# Altium PCB SMT_Oven_V2.PcbDoc
Units mil, origin at the board's own origin, x right, y up, seen from the top; angles counter-clockwise.
Board outline 1968.5 x 2050 mil, 2 copper layers (Top Layer, Bottom Layer); 47 components, 58 nets, 221 pads, 4 vias.
Unrouted connection lines stored in the file: 125.
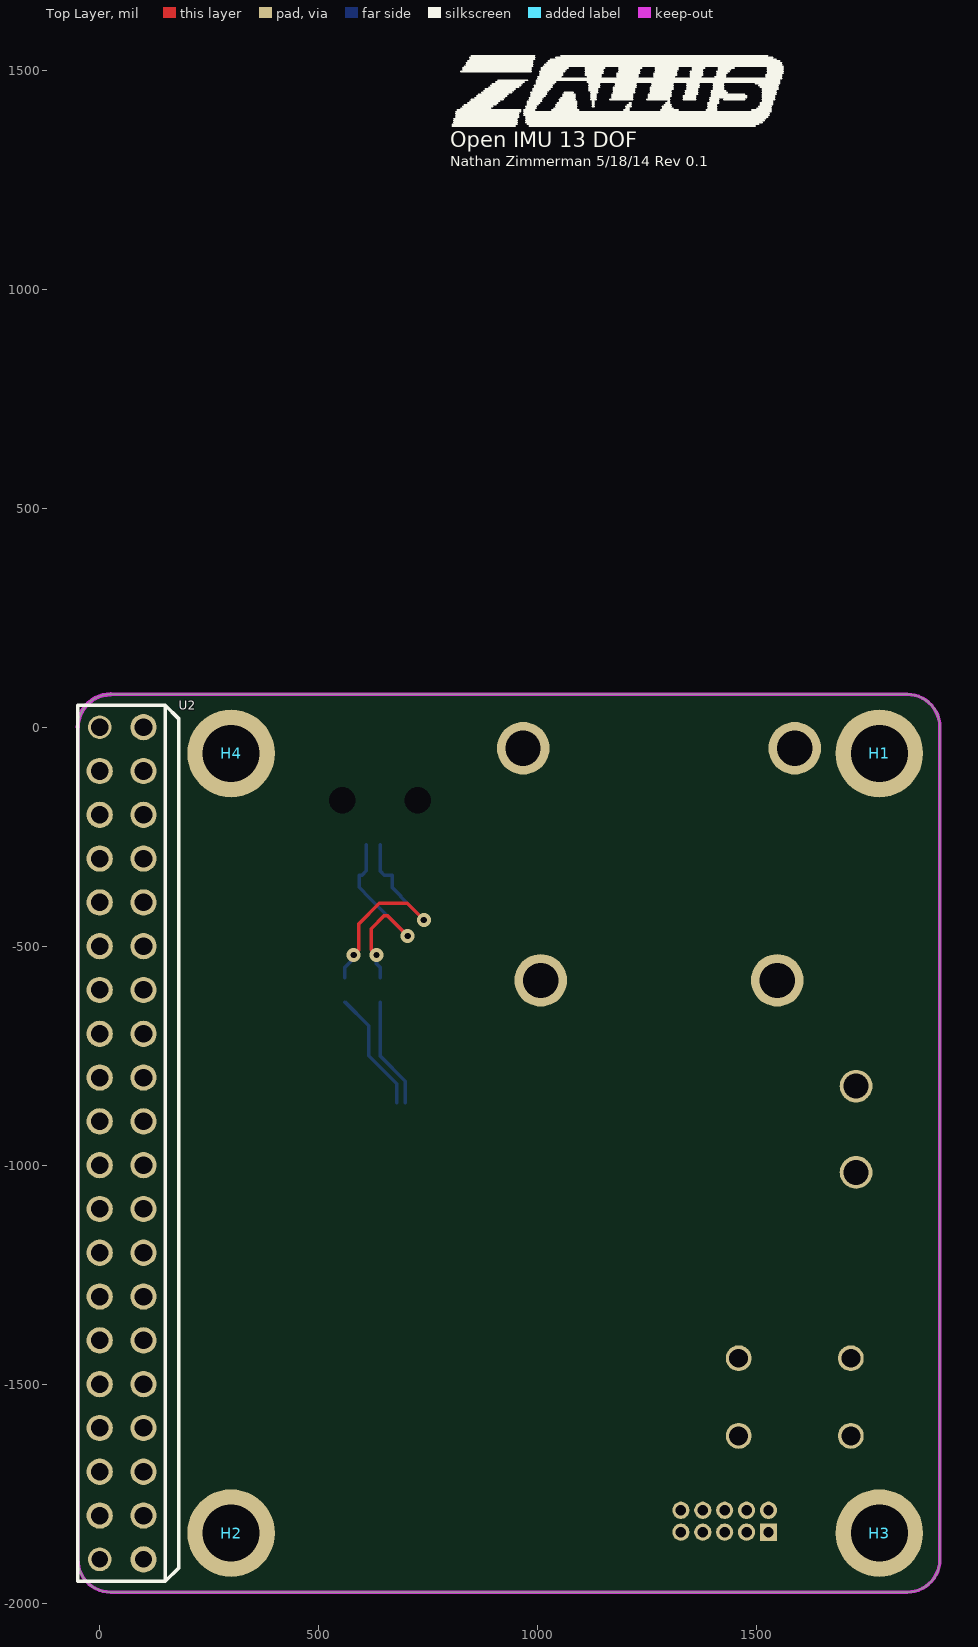
[diagram p0: Top Layer view]
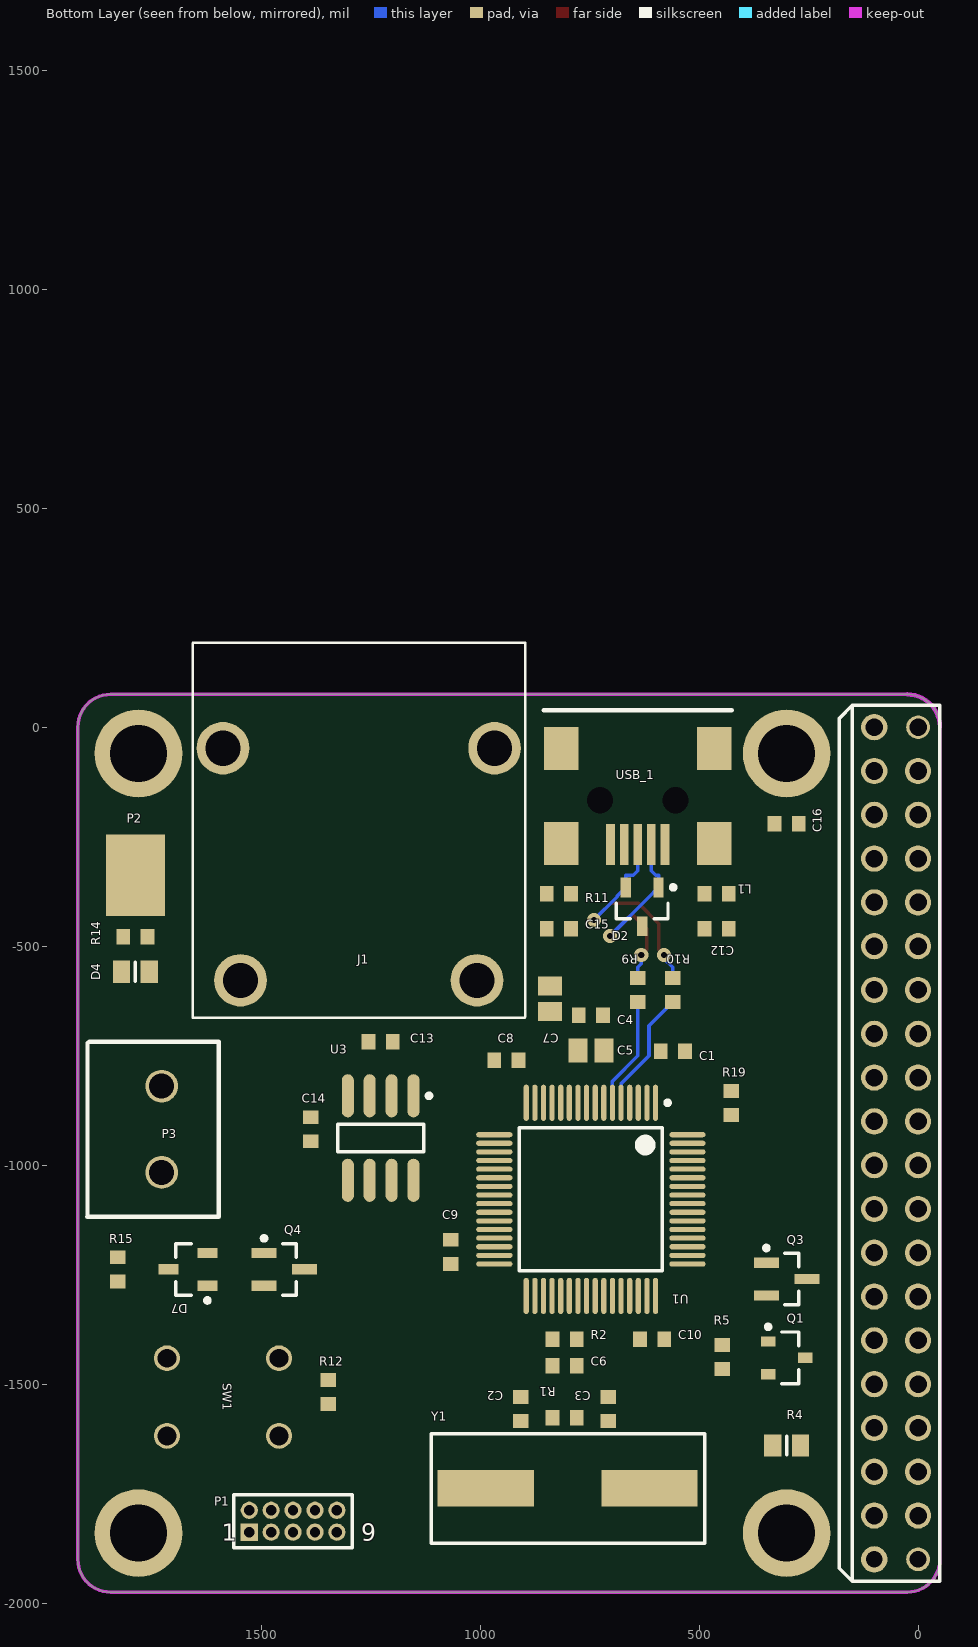
[diagram p1: Bottom Layer view, seen from below]

## Layer stack, top to bottom
Top Layer: signal copper 1.4
Dielectric: dielectric 12.6, FR-4, Dk 4.8
Bottom Layer: signal copper 1.4

## Board outline
-50,-1900 -50,0 cw(c25,0) 25,75 1843.5,75 cw(c1843.5,0) 1918.5,0 1918.5,-1900 cw(c1843.5,-1900) 1843.5,-1975 25,-1975 cw(c25,-1900)

## Design rules (kind name [scope] priority, off if disabled: settings)
AssemblyTestPointUsage [All] p1 off:
AssemblyTestpoint [All] p1 off: testpointundercomponent=TRUE minsize=40 maxsize=100 preferedsize=60 minholesize=0 maxholesize=40 preferedholesize=32 testpointgrid=1 usegrid=TRUE gridtolerance=0.01 allowsidetop=TRUE allowsidebottom=TRUE
Clearance Clearance_1 [IsVia vs IsVia] p1: gap=10
Clearance [All] p2: gap=7
DiffPairsRouting [All] p1: maxlimit=200 minlimit=10 mostfreqgap=10 maxuncoupledlength=1000
FabricationTestPointUsage [All] p1 off: valid=0 allowmultiple=FALSE
FabricationTestpoint [All] p1 off: side=3 testpointundercomponent=TRUE minsize=40 maxsize=100 preferedsize=60 minholesize=0 maxholesize=40 preferedholesize=32 testpointgrid=1 allowsidetop=TRUE allowsidebottom=TRUE usegrid=TRUE gridtolerance=0.01
HoleSize [All] p1: absolutevalues=TRUE maxlimit=250 minlimit=1 maxpercent=80.000 minpercent=20.000
HoleToHoleClearance [All] p1: gap=12 allowstackedmicrovias=FALSE
MinimumSolderMaskSliver [All] p1: minsoldermaskwidth=6
PlaneConnect [All] p1: planeconnectstyle=Relief reliefexpansion=20 reliefentries=4 reliefconductorwidth=20 reliefairgap=10
PolygonConnect PolygonConnect_1 [(InPadClass('All Pads'))] p1: connectstyle=Relief reliefconductorwidth=10 reliefentries=4 polygonreliefangle="90 Angle"
PolygonConnect [All] p2: connectstyle=Direct reliefconductorwidth=10 reliefentries=4 polygonreliefangle="90 Angle"
RoutingVias [All] p1: holewidth=14 width=32 viastyle="Through Hole" minholewidth=14 minwidth=32 maxholewidth=14 maxwidth=32
SilkToSilkClearance [All] p1: silktosilkclearance=4
SilkscreenOverComponentPads [All] p1: minsilkscreentomaskgap=4
SolderMaskExpansion SolderMaskExpansion_4 [InComponent('U4')] p1: expansion=2
SolderMaskExpansion SolderMaskExpansion_5 [InComponent('USB_1')] p2: expansion=2
SolderMaskExpansion SolderMaskExpansion_6 [InComponent('U2')] p3: expansion=6
SolderMaskExpansion SolderMaskExpansion_3 [InComponent('U8')] p4: expansion=2
SolderMaskExpansion SolderMaskExpansion_2 [InComponent('U6')] p5: expansion=6
SolderMaskExpansion SolderMaskExpansion_1 [InComponent('U9')] p6: expansion=6
SolderMaskExpansion [InComponent('U6')] p7: expansion=4
Width Width_3 [InNet('GND')] p1: maxlimit=40 minlimit=6 preferedwidth=12
Width Width_2 [InNet('3.3V')] p2: maxlimit=40 minlimit=6 preferedwidth=12
Width Width_1 [InNet('5V')] p3: maxlimit=40 minlimit=6 preferedwidth=12
Width [All] p4: maxlimit=80 minlimit=8 preferedwidth=8 minimp=50.000000 maximp=50.000000 favimp=50.000000
17 further rules are at their usual default settings.

## Classes and differential pairs
differential pair U: +U_P -U_N
differential pair USB_MCU: +USB_MCU_P -USB_MCU_N

## Components (designator, comment, footprint, x,y, rotation, side; value= is the part's Value field where it differs from the comment)
C1 "0805" 1608[0603] 560,-740 r180 bottom
C2 "0805" 1608[0603] 907,-1556.7 r270 bottom
C3 "0805" 1608[0603] 707,-1556.7 r270 bottom
C4 "0805" 1608[0603] 747,-658 r180 bottom
C5 "0805" C0805 747,-738 r180 bottom
C6 "0805" 1608[0603] 807,-1458 r0 bottom
C7 "0805" C0805 840,-620 r270 bottom
C8 "0805" 1608[0603] 940,-760 r180 bottom
C9 "0805" 1608[0603] 1067,-1198 r90 bottom
C10 "0805" 1608[0603] 607,-1398 r0 bottom
C12 "0805" 1608[0603] 460,-460 r0 bottom
C13 "0805" 1608[0603] 1227,-718 r0 bottom
C14 "0805" 1608[0603] 1387,-918 r270 bottom
C15 "0805" 1608[0603] 820,-460 r180 bottom
C16 "0805" 1608[0603] 300,-220 r180 bottom
D2 "Bat45C" SOT-23B_N 630,-410 r270 bottom
D4 "LED3" 6-0805_L 1787,-558 r0 bottom
D7 "Bat45C" SOT-23B_N 1667,-1238 r0 bottom
H1 "stand_off" 4-40_screw_hole 1780,-60 r0 top
H2 "stand_off" 4-40_screw_hole 300,-1840 r0 top
H3 "stand_off" 4-40_screw_hole 1780,-1840 r0 top
H4 "stand_off" 4-40_screw_hole 300,-60 r0 top
J1 "K_Female" PCC_SMP_K 1547,-578 r180 bottom
L1 "FB" 1608[0603] 460,-380 r0 bottom
P1 "Header 5X2" MHDR2X5 1527,-1838 r180 bottom
P2 "GND_CLIP" GND_CLIP 1787,-338 r270 bottom
P3 "Relay" 5mm_2TERM 1727,-918 r90 bottom
Q1 "k" SOT-23_L 300,-1440 r180 bottom
Q3 "2N7002P" SOT-23_M 300,-1260 r180 bottom
Q4 "2N7002P" SOT-23_M 1447,-1238 r180 bottom
R1 "Res1" 1608[0603] 807,-1576.7 r180 bottom
R2 "Res1" 1608[0603] 807,-1398 r180 bottom
R4 "Res1" 6-0805_L 300,-1640 r0 bottom
R5 "Res1" 1608[0603] 447,-1438 r90 bottom
R9 "Res1" 1608[0603] 640,-600 r270 bottom
R10 "Res1" 1608[0603] 560,-600 r270 bottom
R11 "Res1" 1608[0603] 820,-380 r0 bottom
R12 "Res1" 1608[0603] 1347,-1518 r90 bottom
R14 "Res1" 1608[0603] 1787,-478 r180 bottom
R15 "Res1" 1608[0603] 1827,-1238 r90 bottom
R19 "Res1" 1608[0603] 427,-858 r90 bottom
SW1 "D6x-XX" Tact_ButtonVV 1587,-1618 r180 bottom
U1 "MKL25Z64VLH4" TSQFP50P1200X1200-64M 747,-1078 r270 bottom
U2 "SSD1298" SSD1289_FT 0,0 r0 top
U3 "MAX6675" SO8_M 1227,-938 r270 bottom
USB_1 "USB-M2xFxx" USB-M2xFxx 640,-315 r0 bottom
Y1 "8MHz" crystal 987,-1738 r180 bottom

## Footprints (in the part's own frame and the unit in brackets; to place one, negate y for a bottom-side part, rotate by r counter-clockwise, add the part's x,y. Pads: shape width x height; smd on the part's side, far side on the other; paste and mask are expansions set on the pad)
4-40_screw_hole [mil] "4-40_screw_hole"
  round 200 hole 130: 1(0,0)
5mm_2TERM [mm]
  round 1.9 hole 1.45: 1(-2.5,0) 2(2.5,0)
  silkscreen extent -5.08,-3.3 5.08,4.32
6-0805_L [mm] "Chip Resistor, Body 2.0x1.2mm, IPC High Density"
  rect 1x1.3 smd: 1(-0.8,0) 2(0.8,0)
  silkscreen extent 0,-0.55 0,0.55, body extent -1.07,-0.7 1.07,0.7, height 0.7
1608[0603] [mm] "Chip Capacitor, Body 1.6x0.8mm, IPC High Density"
  rect 0.8x0.9 smd: 1(-0.7,0) 2(0.7,0)
  body extent -0.87,-0.48 0.87,0.48, height 1.3
C0805 [mm] "Chip Capacitor, Body 2.0x1.3mm, IPC High Density"
  rect 1.1x1.4 smd: 1(-0.75,0) 2(0.75,0)
  body extent -1.1,-0.72 1.1,0.72, height 1.4
crystal [mil]
  rect 220x83 smd: 1(0,0) 2(374,0)
  silkscreen extent -125,-125 500,125, body extent -37,-95 413,95, height 20
GND_CLIP [mil] "Ground clip for a probe"
  rect 185x135 smd: 1(0,0)
MHDR2X5 [mm]
  rect 1x1 hole 0.6: 1(0,0)
  round 1 hole 0.6: 2(0,1.27) 3(1.27,0) 4(1.27,1.27) 5(2.54,0) 6(2.54,1.27) 7(3.81,0) 8(3.81,1.27) 9(5.08,0) 10(5.08,1.27)
  silkscreen extent -0.9,-0.9 5.98,2.17
PCC_SMP_K [mil]
  round 120 hole 80: 1(0,0) 2(540,0) ""(-40,530) ""(580,530)
  silkscreen extent -109,-85 650,771
SO8_M [mm] "SOIC, 8-Leads, Body 4.9x3.9mm, Pitch 1.27mm, IPC Low Density"
  oval 2.5x0.7 smd: 1(-2.45,1.905) 2(-2.45,0.635) 3(-2.45,-0.635) 4(-2.45,-1.905) 5(2.45,-1.905) 6(2.45,-0.635) 7(2.45,0.635) 8(2.45,1.905)
  silkscreen extent -2.57,-2.5 0.8,2.93, body extent -2,-2.5 2,2.5, height 1.75
SOT-23_L [mm] "SOT23, 3-Leads, Body 2.9x1.3mm, Pitch 0.95mm, Lead Span 2.5mm, IPC High Density"
  rect 0.85x0.6 smd: 1(-1.075,0.95) 2(-1.075,-0.95) 3(1.075,0)
  silkscreen extent -1.2,-1.5 0.7,1.92, body extent -0.7,-1.5 0.7,1.5, height 1.1
SOT-23_M [mm] "SOT23, 3-Leads, Body 2.9x1.3mm, Pitch 0.95mm, Lead Span 2.5mm, IPC Low Density"
  rect 1.45x0.6 smd: 1(-1.175,0.95) 2(-1.175,-0.95) 3(1.175,0)
  silkscreen extent -1.3,-1.5 0.7,1.92, body extent -0.7,-1.5 0.7,1.5, height 1.1
SOT-23B_N [mm] "SOT23, 3-Leads, Body 2.9x1.3mm, Pitch 0.95mm, Lead Span 2.4mm, IPC Medium Density"
  rect 1.15x0.6 smd: 1(-1.125,0.95) 2(-1.125,-0.95) 3(1.125,0)
  silkscreen extent -1.25,-1.5 0.7,1.92, body extent -0.7,-1.5 0.7,1.5, height 1.14
SSD1289_FT [mil]
  round 54 hole 40: 1(0,0)
  round 60 hole 40: 2(0,-100) 3(0,-200) 4(0,-300) 5(0,-400) 6(0,-500) 7(0,-600) 8(0,-700) 9(0,-800) 10(0,-900) 11(0,-1000) 12(0,-1100) 13(0,-1200) 14(0,-1300) 15(0,-1400) 16(0,-1500) 17(0,-1600) 18(0,-1700) 19(0,-1800) 21(100,0) 22(100,-100) 23(100,-200) 24(100,-300) 25(100,-400) 26(100,-500) 27(100,-600) 28(100,-700) 29(100,-800) 30(100,-900) 31(100,-1000) 32(100,-1100) 33(100,-1200) 34(100,-1300) 35(100,-1400) 36(100,-1500) 37(100,-1600) 38(100,-1700) 39(100,-1800)
  round 54 hole 38: 20(0,-1900)
  round 60 hole 38: 40(100,-1900)
  silkscreen extent -50,-1950 180,50
Tact_ButtonVV [mm]
  round 1.5 hole 1.1: 1(-3.25,0) 2(3.25,0) 3(-3.25,4.5) 4(3.25,4.5)
TSQFP50P1200X1200-64M [mm] "Thin QFP, 64-Leads, Body 10x10mm, Pitch 0.5mm, IPC Low Density"
  oval 2.1x0.3 smd: 1(-5.6,3.75) 2(-5.6,3.25) 3(-5.6,2.75) 4(-5.6,2.25) 5(-5.6,1.75) 6(-5.6,1.25) 7(-5.6,0.75) 8(-5.6,0.25) 9(-5.6,-0.25) 10(-5.6,-0.75) 11(-5.6,-1.25) 12(-5.6,-1.75) 13(-5.6,-2.25) 14(-5.6,-2.75) 15(-5.6,-3.25) 16(-5.6,-3.75) 33(5.6,-3.75) 34(5.6,-3.25) 35(5.6,-2.75) 36(5.6,-2.25) 37(5.6,-1.75) 38(5.6,-1.25) 39(5.6,-0.75) 40(5.6,-0.25) 41(5.6,0.25) 42(5.6,0.75) 43(5.6,1.25) 44(5.6,1.75) 45(5.6,2.25) 46(5.6,2.75) 47(5.6,3.25) 48(5.6,3.75)
  oval 0.3x2.1 smd: 17(-3.75,-5.6) 18(-3.25,-5.6) 19(-2.75,-5.6) 20(-2.25,-5.6) 21(-1.75,-5.6) 22(-1.25,-5.6) 23(-0.75,-5.6) 24(-0.25,-5.6) 25(0.25,-5.6) 26(0.75,-5.6) 27(1.25,-5.6) 28(1.75,-5.6) 29(2.25,-5.6) 30(2.75,-5.6) 31(3.25,-5.6) 32(3.75,-5.6) 49(3.75,5.6) 50(3.25,5.6) 51(2.75,5.6) 52(2.25,5.6) 53(1.75,5.6) 54(1.25,5.6) 55(0.75,5.6) 56(0.25,5.6) 57(-0.25,5.6) 58(-0.75,5.6) 59(-1.25,5.6) 60(-1.75,5.6) 61(-2.25,5.6) 62(-2.75,5.6) 63(-3.25,5.6) 64(-3.75,5.6)
  silkscreen extent -5.72,-4.15 4.15,4.57, body extent -5,-5 5,5, height 1.6
USB-M2xFxx [mil] "USB Mini B connector SMD"
  rect 20x94 smd: 1(-62,-47) 2(-31,-47) 3(0,-47) 4(31,-47) 5(62,-47)
  rect 79x98 smd: 6(-175,-49) 7(-175,-266) 8(175,-266) 9(175,-49)
  round 0 hole 60 unplated: ""(-86,-148) ""(86,-148)
  silkscreen extent -215,-354 215,-354

## Part data
C1 C2 C3 C4 C5 C6 C7 C8 C9 C10 C12 C13 C14 C15 C16: library part "Cap Semi", "Capacitor (Semiconductor SIM Model)"
D4: "Typical BLUE SiC LED"
J1: library part K_Female_Thermocouple, "K_Female_Thermocouple"
L1: library part Inductor, "Inductor"
P1: "Header, 5-Pin, Dual row"
P3: library part MHDR1X2, "Header, 2-Pin"
Q1: library part PMOS-2, "P-Channel Power MOSFET"
R1 R2 R4 R5 R9 R10 R11 R12 R14 R15 R19: "Resistor"
SW1: "D6x-XX push button"
U1: "MKL25Z64VLH4 MCU"
U2: library part SSD1298_LCD, "SSD1298 LCD"
U3: library part Component_1
USB_1: "USB Mini-B for USB-M2xFxx"
Y1: library part XTAL, "Crystal Oscillator"

## Via types
v1: diameter 32, hole 14, Top Layer to Bottom Layer, 4 vias

## Nets (pads, with @x,y where several pads share a name; then routed paths per layer and width w, separated by ;. In a path a pad name is that pad's centre, name@x,y a point inside that pad or via, vN(x,y) a via of type N, cw(c..) or ccw(c..) an arc to the next point about the centre after c; other vN are vias at no path point)
3.3V: C1.2 C4.2 C5.2 C8.2 C9.2 C10.1 C14.1 C16.2 P1.1 R2.2 R12.1 R19.2 U1.3 U1.7 U1.13 U1.14 U1.30 U1.48 U2.2 U3.4
5V: C7.2 C12.1 D7.1 L1.1 Q1.2 R5.1 R15.2 U1.8
_NC1: U3.8
EXTAL+: C2.2 R1.1 U1.32 Y1.1
EXTAL-: C3.2 R1.2 U1.33 Y1.2
GND: C1.1 C2.1 C3.1 C4.1 C5.1 C6.1 C7.1 C8.1 C9.1 C10.2 C12.2 C14.2 C15.2 C16.1 D2.3 D4.2 P1.3 P1.5 P2.1 Q3.3 Q4.3 R11.1 SW1.1 SW1.2 U1.4 U1.15 U1.16 U1.31 U1.47 U2.1 U3.1 USB_1.5
KL25_SWD_CLK: P1.4 U1.22
LCD_BL: Q3.1 U1.42
LCD_CS: U1.28 U2.15
LCD_DB0: U1.43 U2.21
LCD_DB1: U1.44 U2.22
LCD_DB2: U1.45 U2.23
LCD_DB3: U1.46 U2.24
LCD_DB4: U1.49 U2.25
LCD_DB5: U1.50 U2.26
LCD_DB6: U1.51 U2.27
LCD_DB7: U1.52 U2.28
LCD_DB8: U1.53 U2.7
LCD_DB9: U1.54 U2.8
LCD_DB10: U1.55 U2.9
LCD_DB11: U1.56 U2.10
LCD_DB12: U1.35 U2.11
LCD_DB13: U1.36 U2.12
LCD_DB14: U1.37 U2.13
LCD_DB15: U1.38 U2.14
LCD_RD: U1.27 U2.6
LCD_RS: U1.24 U2.4
LCD_RST: U1.23 U2.17
LCD_WR: U1.29 U2.5
LED: R14.1 U1.19
NC1_ST: H1.1
NC2_ST: H2.1
NC3_ST: H3.1
NC4_ST: H4.1
NetC13_1: C13.1 J1.2 U3.2
NetC13_2: C13.2 J1.1 U3.3
NetC15_1: C15.1 R11.2 USB_1.6 USB_1.7 USB_1.8 USB_1.9
NetD4_1: D4.1 R14.2
NetD7_3: D7.3 P3.2 Q4.2
NetL1_2: L1.2 USB_1.1
NetP3_1: P3.1 R15.1
NetQ1_1: Q1.1 Q3.2 R5.2
NetQ1_3: Q1.3 R4.2
NetR4_1: R4.1 U2.19
PWR_RELAY: Q4.1 R19.1 U1.64
RST_TGTMCU: C6.2 P1.10 R2.1 U1.34
SD_CS: U1.18 U2.38
SPI_A_MISO: U1.60 U2.33 U2.35 U3.7
SPI_A_MOSI: U1.59 U2.31 U2.37
SPI_A_SCLK: U1.58 U2.29 U2.36 U3.5
SW1: R12.2 SW1.3 SW1.4 U1.17
SWD_DIO_TGTMCU: P1.2 U1.25
TCOUPLE_CS: U1.63 U3.6
TOUCH_CS: U1.62 U2.30
U_N: D2.1 R9.1 USB_1.2 | length 500.9
  Top Layer w8: v1(632,-520) 620,-508 620,-460 650,-430 656.46,-430 v1(703.23,-476.77)
  Bottom Layer w8: USB_1.2 609,-328 599,-338 592.6,-338 D2.1 617,-390.11 617,-390.54 v1(703.23,-476.77) ; v1(632,-520) 632,-540 640,-548 R9.1
U_P: D2.2 R10.1 USB_1.3 | length 543.9
  Top Layer w8: v1(580,-520) 592,-508 592,-448.4 638.4,-402 702,-402 v1(740,-440)
  Bottom Layer w8: R10.1 560,-548 580,-528 v1(580,-520) ; USB_1.3 640,-328 650,-338 667.4,-338 D2.2 687,-385.31 687,-387 v1(740,-440)
USB_MCU_N: R9.2 U1.6 | length 253.9
  Bottom Layer w8: R9.2 640,-750.21 697.79,-808 U1.6
USB_MCU_P: R10.2 U1.5 | length 278.9
  Bottom Layer w8: R10.2 614.31,-681.87 614.31,-749.97 678.1,-813.77 U1.5
pads on no net: D7.2 J1. P1.6 P1.7 P1.8 P1.9 U1.1 U1.2 U1.9 U1.10 U1.11 U1.12 U1.20 U1.21 U1.26 U1.39 U1.40 U1.41 U1.57 U1.61 U2.3 U2.16 U2.18 U2.20 U2.32 U2.34 U2.39 U2.40 USB_1. USB_1.4

## Keep-outs
Keep-Out Layer:
  the board outline again, w8

## Silkscreen, mask and mechanical layers (free items; w line width, h text height)
Top Overlay:
  drawing of 215 lines, arcs and shapes, not listed
  text "Open IMU 13 DOF" at 800.68,1312.68 h60
  text "Nathan Zimmerman 5/18/14 Rev 0.1" at 800.68,1272.68 h40
Mechanical 3:
  text "SMT OVEN V2" at -113,722 h200

## Text inside footprints (layer, text, board x,y; h text height)
P1: Bottom Overlay "1" at 1589.99,-1858 h39.37; Bottom Overlay "9" at 1271.09,-1858 h39.37